# Altium PCB Infrared Reception_PCB.PcbDoc
Units mil, origin at the board's own origin, x right, y up, seen from the top; angles counter-clockwise.
Board outline 1560.03 x 1595.03 mil, 2 copper layers (Top Layer, Bottom Layer); 15 components, 9 nets, 36 pads, 1 vias.
Unrouted connection lines stored in the file: 1.
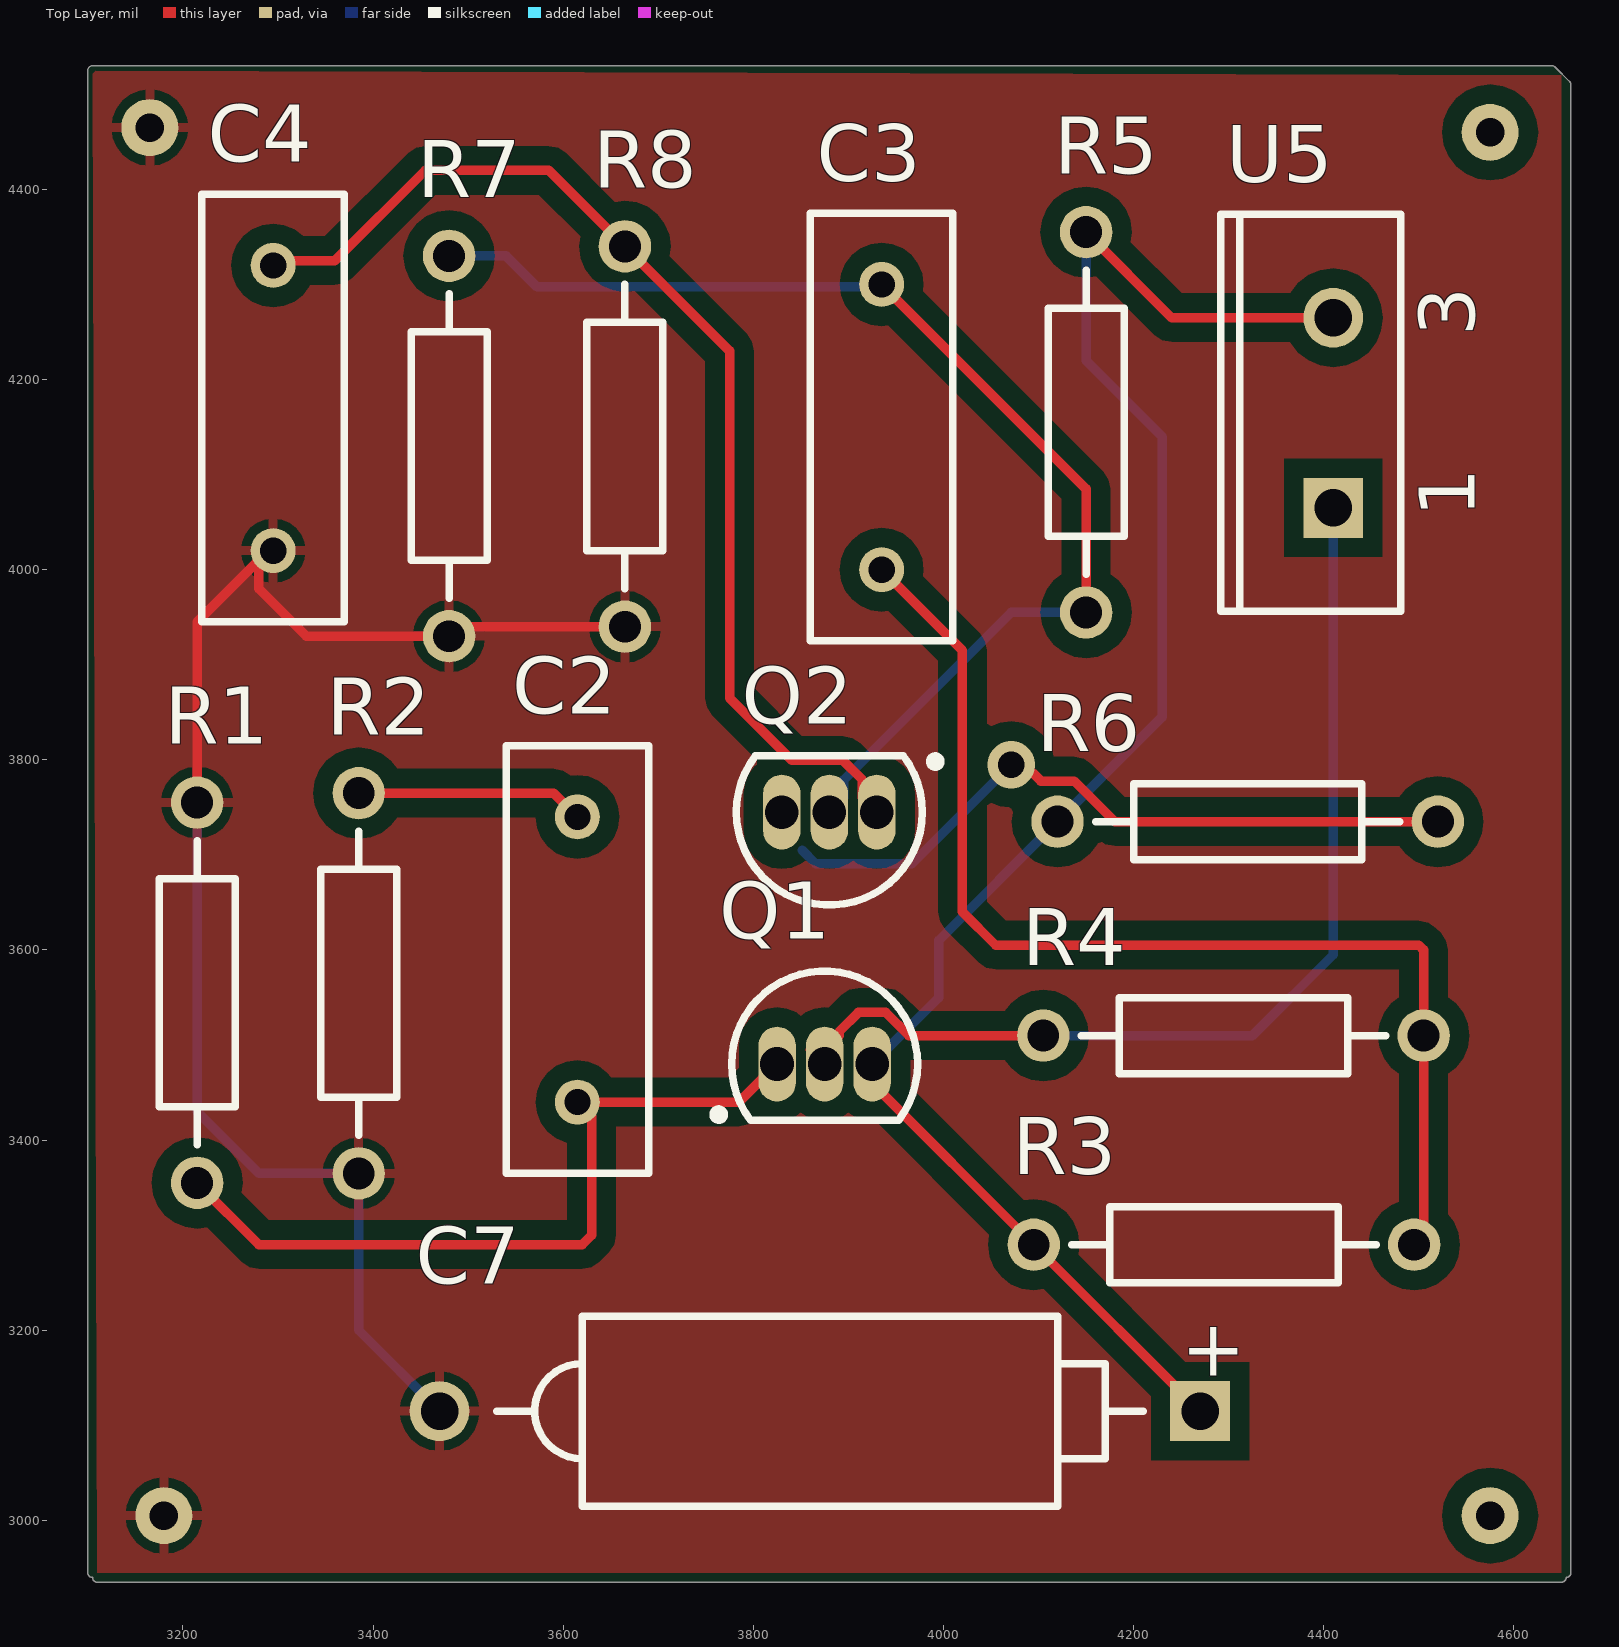
[diagram p0: Top Layer view]
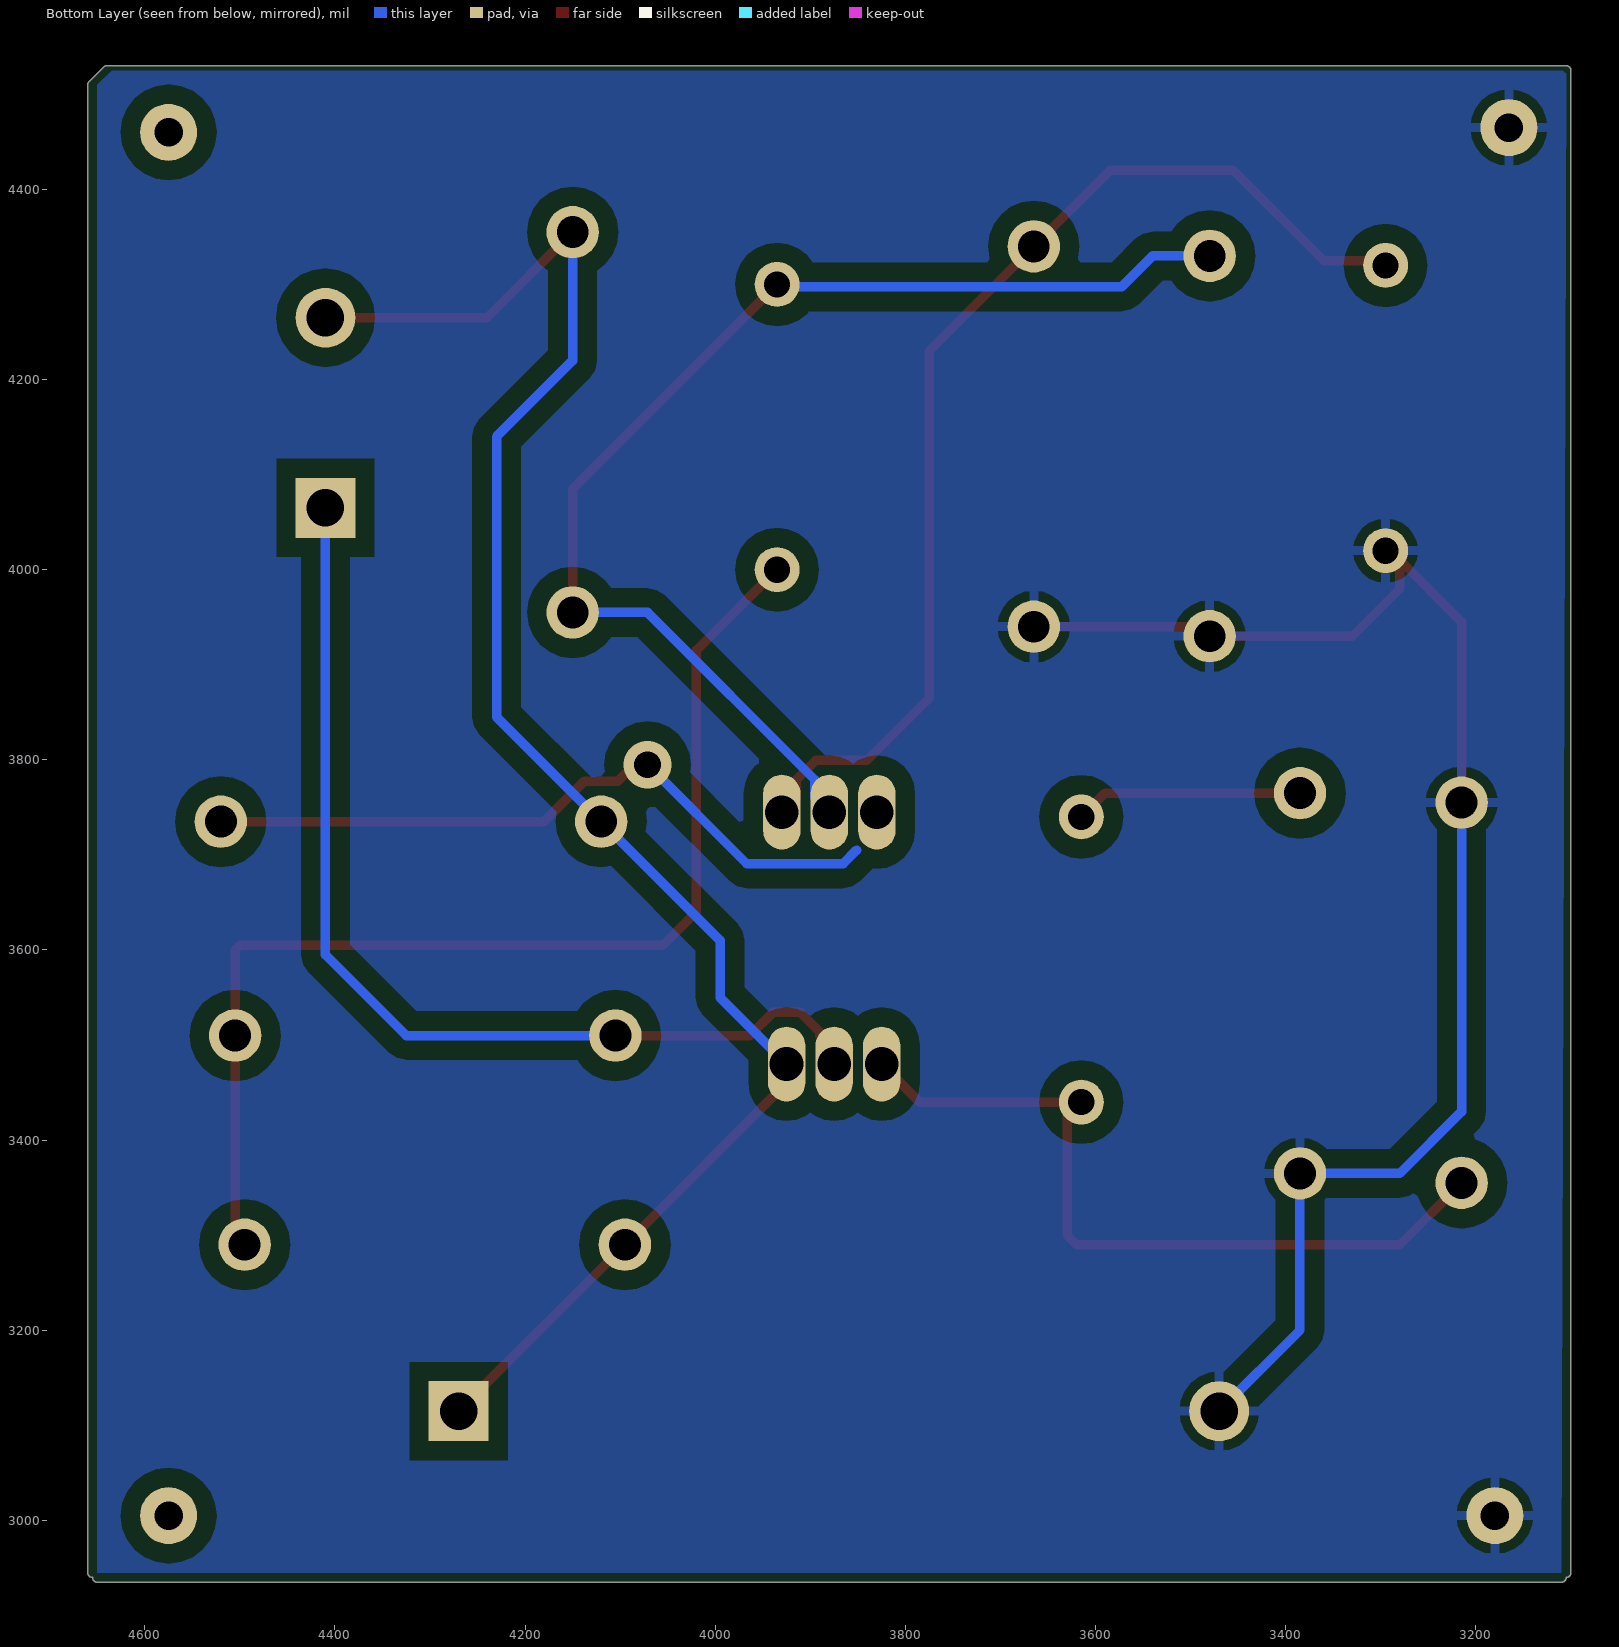
[diagram p1: Bottom Layer view, seen from below]

## Layer stack, top to bottom
Top Solder: solder mask 0.4, Solder Resist, Dk 3.5
Top Layer: signal copper 1.4
Dielectric 1: dielectric 12.6, FR-4, Dk 4.8
Bottom Layer: signal copper 1.4
Bottom Solder: solder mask 0.4, Solder Resist, Dk 3.5

## Board outline
3099.99,2945 ccw(c3105,2945) 3104.99,2939.99 ccw(c3110,2940) 3110,2934.99 4650,2934.99 ccw(c4650,2940) 4655.02,2939.99 ccw(c4655,2945) 4660.02,2945 4660.02,4510 ccw(c4655,4510) 4658.53,4513.56 4658.55,4513.55 4643.55,4528.55 4643.56,4528.53 ccw(c4640,4525) 4640,4530.02 3105,4530.02 ccw(c3105,4525) 3099.99,4525

## Design rules (kind name [scope] priority, off if disabled: settings)
Clearance [All] p1: gap=20 ignorepadtopadclearanceinfootprint=FALSE
PolygonConnect [All] p1: connectstyle=Relief reliefconductorwidth=10 reliefentries=4 polygonreliefangle="90 Angle" airgapwidth=10
RoomDefinition Recieve [InComponentClass('Recieve')] p1: confinementstyle=ConfineIn formatcopy=TRUE lockcomponents=FALSE outline 3100,2940 4630,2940 4630,4515 3100,4515
RoutingVias [All] p1: holewidth=28 width=50 viastyle="Through Hole" minholewidth=28 minwidth=50 maxholewidth=28 maxwidth=50
SolderMaskExpansion [All] p1: expansion=4
Width [All] p1: maxlimit=10 minlimit=10 preferedwidth=10
30 further rules are at their usual default settings.

## Classes and differential pairs
component class Recieve: C2 C3 C7 Q1 Q2 R1 R2 R3 R4 R5 R6 R7 R8 U5

## Components (designator, comment, footprint, x,y, rotation, side; value= is the part's Value field where it differs from the comment)
C2 "Cap" RAD-0.3 3615,3590 r90 top value=22pF
C3 "Cap" RAD-0.3 3935,4150 r90 top value=47uF
C4 "Cap" RAD-0.3 3295,4170 r90 top value=47uF
C7 "Cap Pol2" POLAR0.8 3870,3115 r0 top value=22pF
Q1 "BC848B" TO-92A 3875,3480 r270 top
Q2 "2SC1815" TO-92A 3880,3745 r90 top
R1 "Res2" AXIAL-0.4 3215,3555 r270 top value=10K
R2 "Res2" AXIAL-0.4 3385,3565 r90 top value=30K
R3 "Res2" AXIAL-0.4 4295,3290 r180 top value=15K
R4 "Res2" AXIAL-0.4 4305,3510 r180 top value=820K
R5 "Res2" AXIAL-0.4 4150,4155 r90 top value=25.71K
R6 "Res2" AXIAL-0.4 4320,3735 r180 top value=5.1K
R7 "Res2" AXIAL-0.4 3480,4130 r90 top value=10.5K
R8 "Res2" AXIAL-0.4 3665,4140 r90 top value=2K
U5 "Photo NPN" TO-220_A 4410,4165 r90 top

## Footprints (in the part's own frame and the unit in brackets; to place one, negate y for a bottom-side part, rotate by r counter-clockwise, add the part's x,y. Pads: shape width x height; smd on the part's side, far side on the other; paste and mask are expansions set on the pad)
AXIAL-0.4 [mm] "Axial Device, Thru-Hole; 2 Leads; 0.4 in Pin Spacing"
  round 1.4 hole 0.85: 1(-5.08,0) 2(5.08,0)
  silkscreen extent -4.06,-1.02 4.06,1.02
POLAR0.8 [mm] "Polarized Capacitor; 2 Leads"
  rect 1.6x1.6 hole 1: 1(10.16,0)
  round 1.6 hole 1: 2(-10.16,0)
  silkscreen extent -8.64,-2.54 8.64,2.54
RAD-0.3 [mm] "Radial Cap, Thru-Hole; 2 Leads; 0.3 in Pin Spacing"
  round 1.2 hole 0.7: 1(-3.81,0) 2(3.81,0)
  silkscreen extent -5.71,-1.91 5.71,1.91
TO-92A [mm] "TO, Flat Index; 3 In-Line, Axial Leads; Body Dia. 4.5mm; Leads 0.51 x 0.48 mm (max)"
  oval 2x1 hole 0.9: 1(0,-1.27) 2(0,0) 3(0,1.27)
  silkscreen extent -2.48,-2.95 1.5,2.48, body extent -2.48,-2.5 1.5,2.5, height 6.86
TO-220_A [mm] "TO, Thru-Hole, Vertical, Heatsink Mounted; 3 In-Line Leads (1 Absent); Pitch 2.54 mm"
  rect 1.6x1.6 hole 1: 1(-2.54,0)
  round 1.6 hole 1: 3(2.54,0)
  silkscreen extent -5.3,-1.8 5.3,3

## Part data
C2 C3 C4: "Capacitor", LatestRevisionDate=17-Jul-2002, LatestRevisionNote="Re-released for DXP Platform.", PackageDescription="Radial Cap, Thru-Hole; 2 Leads; 0.3 in Pin Spacing", PackageReference=RAD-0.3, Published=8-Jun-2000, Publisher="Altium Limited"
C7: "Polarized Capacitor (Axial)", LatestRevisionDate=17-Jul-2002, LatestRevisionNote="Re-released for DXP Platform.", PackageDescription="Polarized Capacitor; 2 Leads", PackageReference=POLAR0.8, Published=8-Jun-2000, Publisher="Altium Limited"
Q1 Q2: library part 2N3904, "NPN General Purpose Amplifier", ComponentLink1Description="Manufacturer Link", ComponentLink1URL=http://www.fairchildsemi.com/, ComponentLink2Description=Datasheet, ComponentLink2URL=http://www.fairchildsemi.com/ds/2N%2F2N3904.pdf, DatasheetVersion=1997, LatestRevisionDate=15-Jan-2003, LatestRevisionNote="PCB Footprint 'BCY-W3/D4.7' replaced", PackageDescription="TO, Flat Index; 3 In-Line, Axial Leads; Body Dia. 4.5mm; Leads 0.51 x 0.48 mm (max)", PackageReference=TO-92A, PackageVersion=Sep-1998, Published=8-Jun-2000, Publisher="Altium Limited"
R1 R2 R3 R4 R5 R6 R7 R8: "Resistor", LatestRevisionDate=17-Jul-2002, LatestRevisionNote="Re-released for DXP Platform.", PackageDescription="Axial Device, Thru-Hole; 2 Leads; 0.4 in Pin Spacing", PackageReference=AXIAL-0.4, Published=8-Jun-2000, Publisher="Altium Limited"
U5: "NPN Phototransistor", Code_JEDEC=TO-220-AC, LatestRevisionDate=17-Jul-2002, LatestRevisionNote="Re-released for DXP Platform.", PackageReference=TO-220_A, Published=24-Mar-1999, Publisher="Altium Limited"

## Free pads (board coordinates)
  round 60 hole 30: 2(4575,4460) 3(4575,3005) 4(3180,3005) 5(3165.22,4465)

## Via types
v1: diameter 50, hole 28, Top Layer to Bottom Layer, 1 vias

## Nets (pads, with @x,y where several pads share a name; then routed paths per layer and width w, separated by ;. In a path a pad name is that pad's centre, name@x,y a point inside that pad or via, vN(x,y) a via of type N, cw(c..) or ccw(c..) an arc to the next point about the centre after c; other vN are vias at no path point)
GND: C4.1 C7.2 pad.4 pad.5 R1.1 R2.1 R7.1 R8.1 | length 1543.1
  Top Layer w10: R1.1@3225,3765 R1.1 3215,3945 3280,4010 3280,3980 3330,3930 R7.1 3490,3940 R8.1
  Bottom Layer w10: R1.1 3215,3430 3280,3365 R2.1 3385,3200 C7.2
NetC2_1: C2.1 Q1.1 R1.2 | length 818.8
  Top Layer w10: R1.2 3280,3290 3620,3290 3630,3300 3630,3425 C2.1 3785,3440 Q1.1
NetC2_2: C2.2 R2.2 | length 240.4
  Top Layer w10: R2.2 3590,3765 C2.2
NetC3_1: C3.1 R3.1 R4.1 | length 1210.9
  Top Layer w10: C3.1 4020,3915 4020,3640 4055,3605 4500,3605 4505,3600 R4.1 4505,3300 R3.1
NetC3_2: C3.2 Q2.2 R5.1 R7.2 | length 1271.6
  Top Layer w10: C3.2 4150,4085 R5.1
  Bottom Layer w10: R7.2 3540,4330 3572.56,4297.44 3932.44,4297.44 C3.2 ; Q2.2 3895.32,3760.32 3895.32,3779.05 4071.26,3955 R5.1
NetC4_2: C4.2 Q2.1 R8.2 | length 1193.7
  Top Layer w10: C4.2@3280,4325 3360,4325 3455,4420 3585,4420 R8.2 3775,4230 3775,3865 3840.63,3799.37 3894.37,3799.37 3914.68,3779.05 3914.68,3760.32 Q2.1
NetQ1_2: Q1.2 R4.2 U5.1 | length 1084.3
  Top Layer w10: Q1.2@3859.68,3495 3874.68,3510 3890.32,3510 3890.32,3514.05 3910.63,3534.37 3939.37,3534.37 3963.74,3510 R4.2
  Bottom Layer w10: R4.2 4325,3510 4410,3595 U5.1
NetQ2_3: Q2.3 R6.1 | length 742.8
  Top Layer w10: v1(4071.26,3795) 4085,3795 4102.44,3777.56 4137.63,3777.56 4180.19,3735 R6.1
  Bottom Layer w10: 3851.26,3705 3865.63,3690.63 3966.89,3690.63 v1(4071.26,3795)
VCC: C7.1 Q1.3 R3.2 R5.2 R6.2 U5.3 | length 1839.7
  Top Layer w10: Q1.3 3925,3460 R3.2 C7.1 ; R5.2 4240,4265 U5.3
  Bottom Layer w10: Q1.3 3995,3550 3995,3610 R6.2 4230,3845 4230,4140 4150,4220 R5.2

## Polygon pours and split planes (outlines as drawn)
GND on Top Layer "Top Layer-GND" (solid, remove dead copper, pour order 6): 3580,4115
GND on Top Layer "GND_L01_P002" (solid, remove dead copper, pour order 2): 4650,4520.02 4650,2945 3110,2945 3105,4525
GND on Bottom Layer "GND_L02_P010" (solid, remove dead copper, pour order 10): 3105,4525 4635,4525 4650,4510 4650,2945 3110,2945
no net on Layer0 "Default Coverlay 1 Top" (split plane): 1000,1000 7000,1000 7000,5000 1000,5000
no net on Layer0 "Default Coverlay 1 Bottom" (split plane): 1000,1000 7000,1000 7000,5000 1000,5000

## Silkscreen, mask and mechanical layers (free items; w line width, h text height)
Drill Drawing:
  lines w10: 3105,2945 3110,2940 4650,2940 4655,2945 4655,4510 4640,4525 3105,4525 3105,2945

## Dimensions
3105,4525 to 4640,4545 on Mechanical 1
3074.01,2935 to 3099.01,4520 on Mechanical 1
3105,4525 to 4655,4630 on Layer0

## Text inside footprints (layer, text, board x,y; h text height)
C7: Top Overlay "+" at 4250,3152.4 h59.06
U5: Top Overlay "3" at 4558.62,4245.31 h59.06 r90; Top Overlay "1" at 4558.62,4055.16 h59.06 r90